# EAGLE board twopropmixtiny (EAGLE 6.6.0)
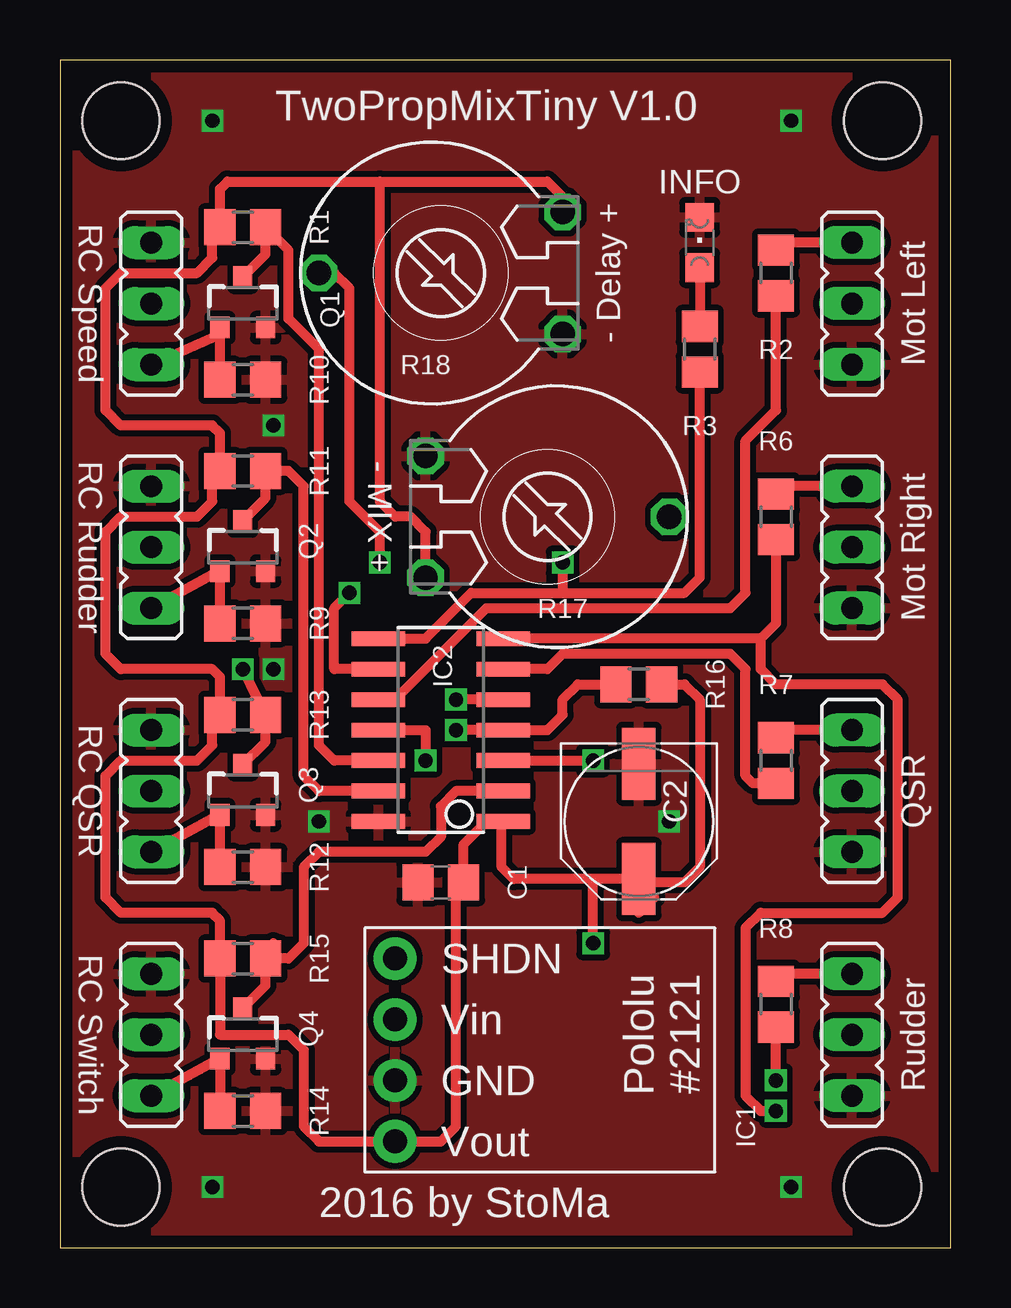
[diagram p0: board, top side]
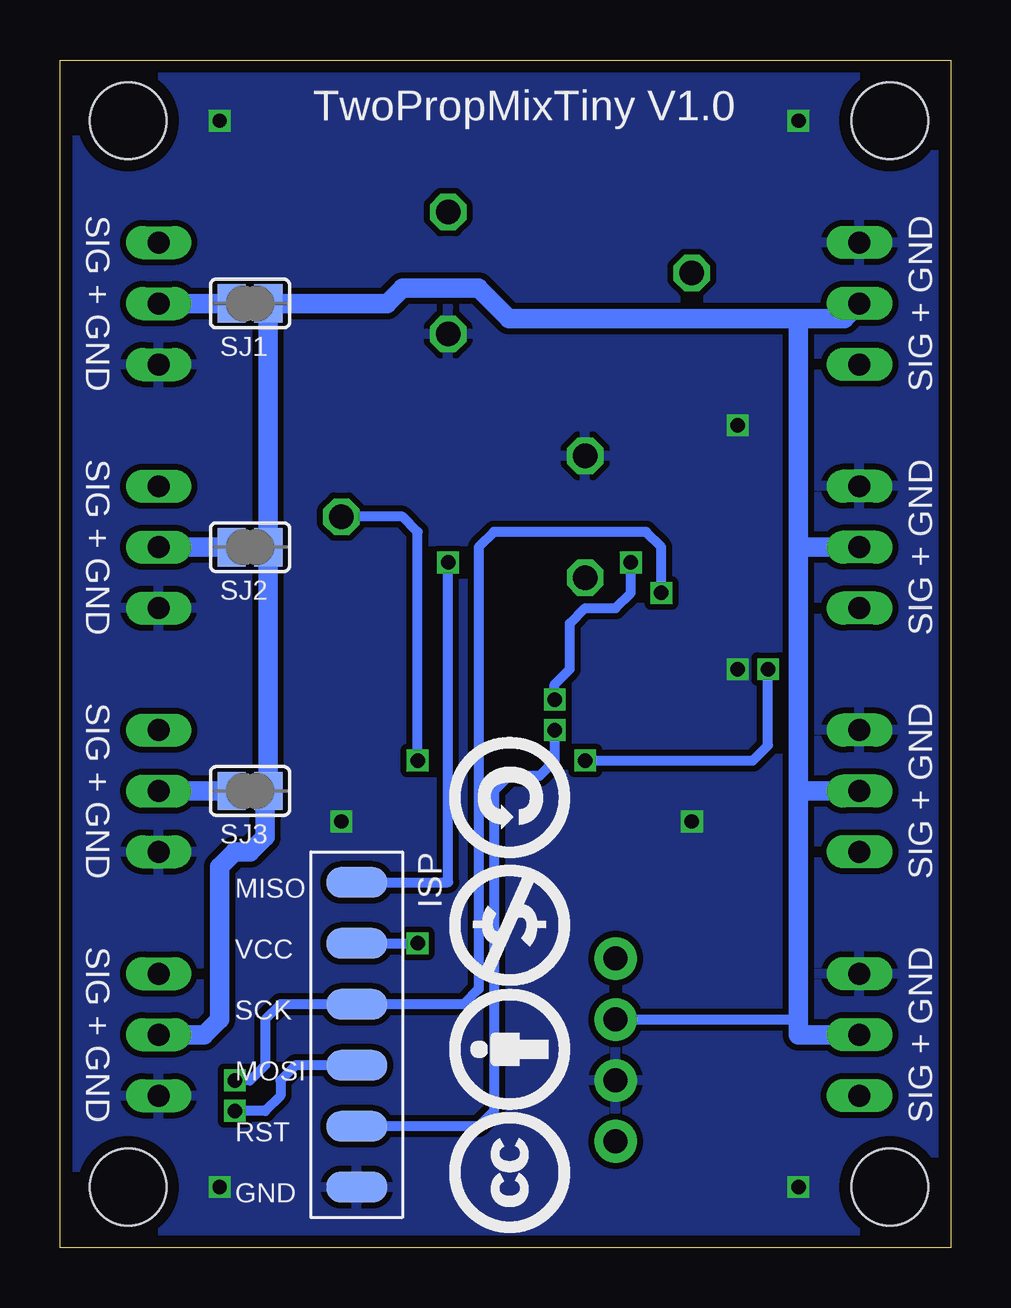
[diagram p1: board, bottom side, seen from below]

Size 37.13 x 49.52 mm. Coordinates in mm from the lower left corner, seen from the top.
Outline: 0,0 37.13,0 37.13,49.52 0,49.52 0,0
Copper layers (1*16): Top 0.035mm / dielectric 1.6mm / Bottom 0.035mm
Design rules "Elecrow_2-layer_PCB_eagle_rule": minimum track width 6mil, minimum drill 12mil, track to track 6mil, track to pad 6mil, pad to pad 6mil, via to via 8mil, smd to smd 0mil, copper to edge 20mil, drill to drill 10mil, minimum pad ring 6mil, minimum via ring 6mil, stop-mask expansion 0mil, vias tented up to drill 100mil, thermal gap 10mil
Holes 3.2 mm at 2.54,2.54 2.54,46.99 34.29,46.99 34.29,2.54

## Footprints (pad centres in the part's own frame; a part is rotated, then mirrored left to right if it is on the bottom)
C0805 = smd 1.3 x 1.5: 1 -0.95,0; 2 0.95,0
PANASONIC_D = smd 3 x 1.4: + 2.4,0; - -2.4,0
POLOLU2121 = drill 1 pad 1.778: GND -6.35,-1.27; SHDN -6.35,3.81; VIN -6.35,1.27; VOUT -6.35,-3.81
SOIC14 = smd 0.61 x 2.21: 1 -3.81,-2.603; 2 -2.54,-2.603; 3 -1.27,-2.603; 4 0,-2.603; 5 1.27,-2.603; 6 2.54,-2.603; 7 3.81,-2.603; 8 3.81,2.603; 9 2.54,2.603; 10 1.27,2.603; 11 0,2.603; 12 -1.27,2.603; 13 -2.54,2.603; 14 -3.81,2.603
JP2 = drill 0.914 long: 1 -2.54,0; 2 0,0; 3 2.54,0
CHIPLED_0805 = smd 1.2 x 1.2: A 0,-1.05; C 0,1.05
SOT23-3 = smd 0.8 x 0.9: 1 -0.95,-1; 2 0.95,-1; 3 0,1.1
R0805 = smd 1.3 x 1.5: 1 -0.95,0; 2 0.95,0
PT-10 = drill 1.016 octagon: A -2.54,-5.08; E 2.54,-5.08; S 0,5.08
SJ = smd 1.168 x 1.6: 1 -0.762,0; 2 0.762,0
ISP = smd 1.27 x 2.54: GND 7.62,0; MISO -5.08,0; MOSI 2.54,0; RST 5.08,0; SCK 0,0; VCC -2.54,0

## Placement (x,y rotation side)
C1  100nF  [C0805]  15.88,15.24 180 top
C2  100µF / 16V  [PANASONIC_D]  24.13,17.78 270 top
IC1  POLOLU2121  [POLOLU2121]  20.32,8.26 0 top
IC2  ATtiny841-SSU  [SOIC14]  15.88,21.59 90 top
JP1  [JP2]  3.81,39.37 270 top
JP2  [JP2]  3.81,29.21 270 top
JP3  [JP2]  3.81,19.05 270 top
JP4  [JP2]  3.81,8.89 270 top
JP5  [JP2]  33.02,39.37 90 top
JP6  [JP2]  33.02,29.21 90 top
JP7  [JP2]  33.02,19.05 90 top
JP8  [JP2]  33.02,8.89 90 top
LED1  [CHIPLED_0805]  26.67,41.91 0 top
Q1  IRLML2502  [SOT23-3]  7.62,39.37 0 top
Q2  IRLML2502  [SOT23-3]  7.62,29.21 0 top
Q3  IRLML2502  [SOT23-3]  7.62,19.05 0 top
Q4  IRLML2502  [SOT23-3]  7.62,8.89 0 top
R1  10k  [R0805]  7.62,42.55 0 top
R2  1k  [R0805]  29.84,40.64 270 top
R3  1k  [R0805]  26.67,37.47 90 top
R6  1k  [R0805]  29.84,30.48 270 top
R7  1k  [R0805]  29.84,20.32 270 top
R8  1k  [R0805]  29.84,10.16 270 top
R9  10k  [R0805]  7.62,26.04 180 top
R10  10k  [R0805]  7.62,36.2 180 top
R11  10k  [R0805]  7.62,32.38 0 top
R12  10k  [R0805]  7.62,15.88 180 top
R13  10k  [R0805]  7.62,22.23 0 top
R14  10k  [R0805]  7.62,5.71 180 top
R15  10k  [R0805]  7.62,12.06 0 top
R16  10k  [R0805]  24.13,23.5 180 top
R17  [PT-10]  20.32,30.48 270 top
R18  [PT-10]  15.88,40.64 90 top
SJ1  [SJ]  29.21,39.37 180 bottom
SJ2  [SJ]  29.21,29.21 180 bottom
SJ3  [SJ]  29.21,19.05 180 bottom
U$1  ISP  [ISP]  24.77,10.16 270 bottom

## Library data of the parts
C1 IC1 JP1-JP8 LED1 R1-R3 R6-R16 U$1 = marco
C2 = rcl
IC2 = avr-6
Q1-Q4 = xmaker
R17 R18 = pot
SJ1-SJ3 = jumper

## Nets
5V: C1.1 C2.+ IC1.VOUT IC2.1 R1.1 R11.1 R13.1 R15.1 R16.1 R17.E R18.E U$1.VCC
GND: C1.2 C2.- IC1.GND IC2.14 JP1.1 JP2.1 JP3.1 JP4.1 JP5.1 JP6.1 JP7.1 JP8.1 LED1.C Q1.2 Q2.2 Q3.2 Q4.2 R9.1 R10.1 R12.1 R14.1 R17.A R18.A U$1.GND
MISO/LED: IC2.8 R3.1 U$1.MISO
MOSI/MOT_RIGHT: IC2.7 R6.2 U$1.MOSI
MOT_LEFT: IC2.10 R2.2
MOT_QSR: IC2.6 R7.2
N$1: JP1.3 Q1.1 R10.2
N$2: JP5.3 R2.1
N$3: JP2.3 Q2.1 R9.2
N$4: LED1.A R3.2
N$5: JP3.3 Q3.1 R12.2
N$6: JP6.3 R6.1
N$7: JP7.3 R7.1
N$8: JP8.3 R8.1
N$9: JP5.2 SJ1.2
N$10: JP6.2 SJ2.2
N$11: JP7.2 SJ3.2
N$19: JP4.3 Q4.1 R14.2
POTI1: IC2.3 R17.S
POTI2: IC2.5 R18.S
RAW: IC1.VIN JP1.2 JP2.2 JP3.2 JP4.2 JP8.2 SJ1.1 SJ2.1 SJ3.1
RESET: IC2.4 R16.2 U$1.RST
SCK/SRV_RUDDER: IC2.9 R8.2 U$1.SCK
SIG_QSR: IC2.11 Q3.3 R13.2
SIG_RUDDER: IC2.13 Q2.3 R11.2
SIG_SPEED: IC2.12 Q1.3 R1.2
SIG_SWITCH: IC2.2 Q4.3 R15.2

## Tracks (layer width: path | path; a pad name or v marks a point on that pad's centre or on a via)
5V  (via drill 0.6)
  Top 0.406: C2.+ 22.23,15.38 | 22.23,15.38 18.91,15.38 18.41,15.88 18.41,17.72 IC2.1 17.78,17.78 16.82,16.82 C1.1 16.51,14.93 16.51,5.08 15.88,4.45 IC1.VOUT 10.79,4.45 10.16,5.08 10.16,8.26 9.53,8.89 6.67,8.89 R15.1 6.67,13.65 6.35,13.97 2.54,13.97 1.91,14.61 1.91,19.68 2.54,20.32 5.71,20.32 6.35,20.95 6.35,21.91 R13.1 6.67,23.81 6.35,24.13 2.54,24.13 1.91,24.77 1.91,29.84 2.54,30.48 5.71,30.48 6.35,31.11 6.35,32.06 R11.1 6.67,33.97 6.35,34.29 2.54,34.29 1.91,34.92 1.91,40.01 2.54,40.64 5.71,40.64 6.35,41.27 6.35,42.23 R1.1 6.67,44.13 6.99,44.45 13.34,44.45 | 13.34,44.45 20.32,44.45 20.95,43.81 R18.E | R17.E 15.24,29.84 14.61,30.48 13.97,30.48 13.34,31.11 13.34,44.45 | R16.1 26.04,23.5 26.67,22.86 26.67,15.88 26.04,15.24 24.27,15.24 C2.+ | C2.+ 24.13,13.97 24.77,14.61 | v22.23,12.7 22.23,15.38
  Bottom 0.406: U$1.VCC v22.23,12.7
GND  (via drill 0.6)
  other vias: 6.35,46.99 30.48,46.99 30.48,2.54 8.89,34.29 6.35,2.54 25.4,17.78 8.89,24.13 10.79,17.78
  pour Top (isolate 0.254): 0,49.53 36.83,49.53 36.83,0 0,0
  pour Bottom (isolate 0.254): 0,49.53 36.83,49.53 36.83,0 0,0
MISO/LED  (via drill 0.6)
  Top 0.406: IC2.8 15.24,25.4 17.14,27.3 20.95,27.3 | 20.95,27.3 26.04,27.3 26.67,27.94 R3.1 | v20.95,28.57 20.95,27.3
  Bottom 0.406: U$1.MISO 20.95,15.24 v20.95,28.57
MOSI/MOT_RIGHT  (via drill 0.6)
  Top 0.406: R6.2 29.84,26.04 29.21,25.4 | 29.21,25.4 IC2.7 | 29.21,25.4 29.21,24.13 29.84,23.5 34.29,23.5 34.92,22.86 34.92,14.61 34.29,13.97 29.21,13.97 28.57,13.34 28.57,6.35 29.21,5.71 v29.84,5.71
  Bottom 0.406: U$1.MOSI 27.3,7.62 27.94,6.99 27.94,6.35 28.57,5.71 v29.84,5.71
MOT_LEFT
  Top 0.406: R2.2 29.84,34.92 28.57,33.66 28.57,27.3 27.94,26.67 17.78,26.67 13.97,22.86 IC2.10
MOT_QSR
  Top 0.406: R7.2 28.89,19.37 28.57,19.68 28.57,24.13 27.94,24.77 20.95,24.77 20.32,24.13 IC2.6
N$1
  Top 0.406: JP1.3 6.67,38.1 | R10.2 6.67,38.1 | 6.67,38.1 Q1.1
N$2
  Top 0.406: JP5.3 30.16,41.91 R2.1
N$3
  Top 0.406: JP2.3 6.62,28.21 Q2.1 R9.2
N$4
  Top 0.406: LED1.A R3.2
N$5
  Top 0.406: JP3.3 6.62,18.05 Q3.1 R12.2
N$6
  Top 0.406: JP6.3 30.16,31.75 R6.1
N$7
  Top 0.406: JP7.3 30.16,21.59 R7.1
N$8
  Top 0.406: JP8.3 30.16,11.43 R8.1
N$9
  Bottom 0.813: JP5.2 SJ1.2
N$10
  Bottom 0.813: JP6.2 SJ2.2
N$11
  Bottom 0.813: JP7.2 SJ3.2
N$19
  Top 0.406: JP4.3 6.62,7.89 Q4.1 R14.2
POTI1  (via drill 0.6)
  Top 0.406: IC2.3 v22.23,20.32
  Bottom 0.406: v22.23,20.32 22.23,29.84 22.86,30.48 R17.S
POTI2  (via drill 0.6)
  Top 0.406: IC2.5 v16.51,22.86 | v13.34,28.57 13.34,29.84 12.06,31.11 12.06,40.01 11.43,40.64 R18.S
  Bottom 0.406: v16.51,22.86 16.51,23.5 15.88,24.13 15.88,26.04 15.24,26.67 13.97,26.67 13.34,27.3 v13.34,28.57
RAW
  Bottom 0.406: IC1.VIN 6.35,9.53 6.35,10.16
  Bottom 0.813: JP8.2 31.11,8.89 30.48,9.53 30.48,15.88 29.84,16.51 29.21,16.51 28.57,17.14 28.57,18.92 SJ3.1 SJ2.1 SJ1.1 23.5,39.37 22.86,40.01 19.68,40.01 18.41,38.73 6.35,38.73 | 6.35,38.73 4.45,38.73 JP1.2 | JP2.2 6.35,29.21 | 6.35,29.21 6.35,38.73 | JP3.2 6.35,19.05 | 6.35,19.05 6.35,29.21 | JP4.2 6.35,8.89 6.35,10.16 6.35,19.05
RESET  (via drill 0.6)
  Top 0.406: R16.2 21.59,23.5 20.95,22.86 20.95,22.23 20.32,21.59 IC2.4 v16.51,21.59
  Bottom 0.406: v16.51,21.59 16.51,20.32 17.14,19.68 18.41,19.68 19.05,19.05 19.05,5.71 19.68,5.08 U$1.RST
SCK/SRV_RUDDER  (via drill 0.6)
  Top 0.406: IC2.9 11.43,24.13 11.43,26.67 v12.06,27.3 | v29.84,6.99 R8.2
  Bottom 0.406: v12.06,27.3 12.06,29.21 12.7,29.84 19.05,29.84 19.68,29.21 19.68,10.79 20.32,10.16 U$1.SCK 27.94,10.16 28.57,9.53 28.57,7.62 29.21,6.99 v29.84,6.99
SIG_QSR  (via drill 0.6)
  Top 0.406: Q3.3 8.57,21.1 R13.2 7.93,23.5 v7.62,24.13 | IC2.11 15.24,21.59 v15.24,20.32
  Bottom 0.406: v15.24,20.32 8.26,20.32 7.62,20.95 v7.62,24.13
SIG_RUDDER
  Top 0.406: Q2.3 8.57,31.26 R11.2 9.53,32.38 10.16,31.75 10.16,19.68 10.79,19.05 IC2.13
SIG_SPEED
  Top 0.406: Q1.3 8.57,41.42 R1.2 9.53,41.59 9.53,38.73 10.79,37.47 10.79,20.95 11.43,20.32 IC2.12
SIG_SWITCH
  Top 0.406: 8.89,12.7 8.89,12.38 R15.2 | Q4.3 8.57,10.94 R15.2 | IC2.2 16.51,19.05 15.88,18.41 15.88,17.14 15.24,16.51 10.79,16.51 10.16,15.88 10.16,12.7 9.53,12.06 R15.2

## Text on the board
bPlace: SIG + GND | SIG + GND | SIG + GND | SIG + GND | SIG + GND | SIG + GND | SIG + GND | SIG + GND
tNames: TwoPropMixTiny V1.0 | INFO | - Delay + | RC Speed | Mot Left | - MIX + | RC Rudder | Mot Right | RC QSR | QSR | RC Switch | Rudder | 2016 by StoMa
bNames: TwoPropMixTiny V1.0